# Altium PCB PCB1.PcbDoc
Units mm, origin at the board's own origin, x right, y up, seen from the top; angles counter-clockwise.
Board outline 104.14 x 50.8 mm, 2 copper layers (Top Layer, Bottom Layer); 42 components, 27 nets, 105 pads, 0 vias.
Unrouted connection lines stored in the file: 39.
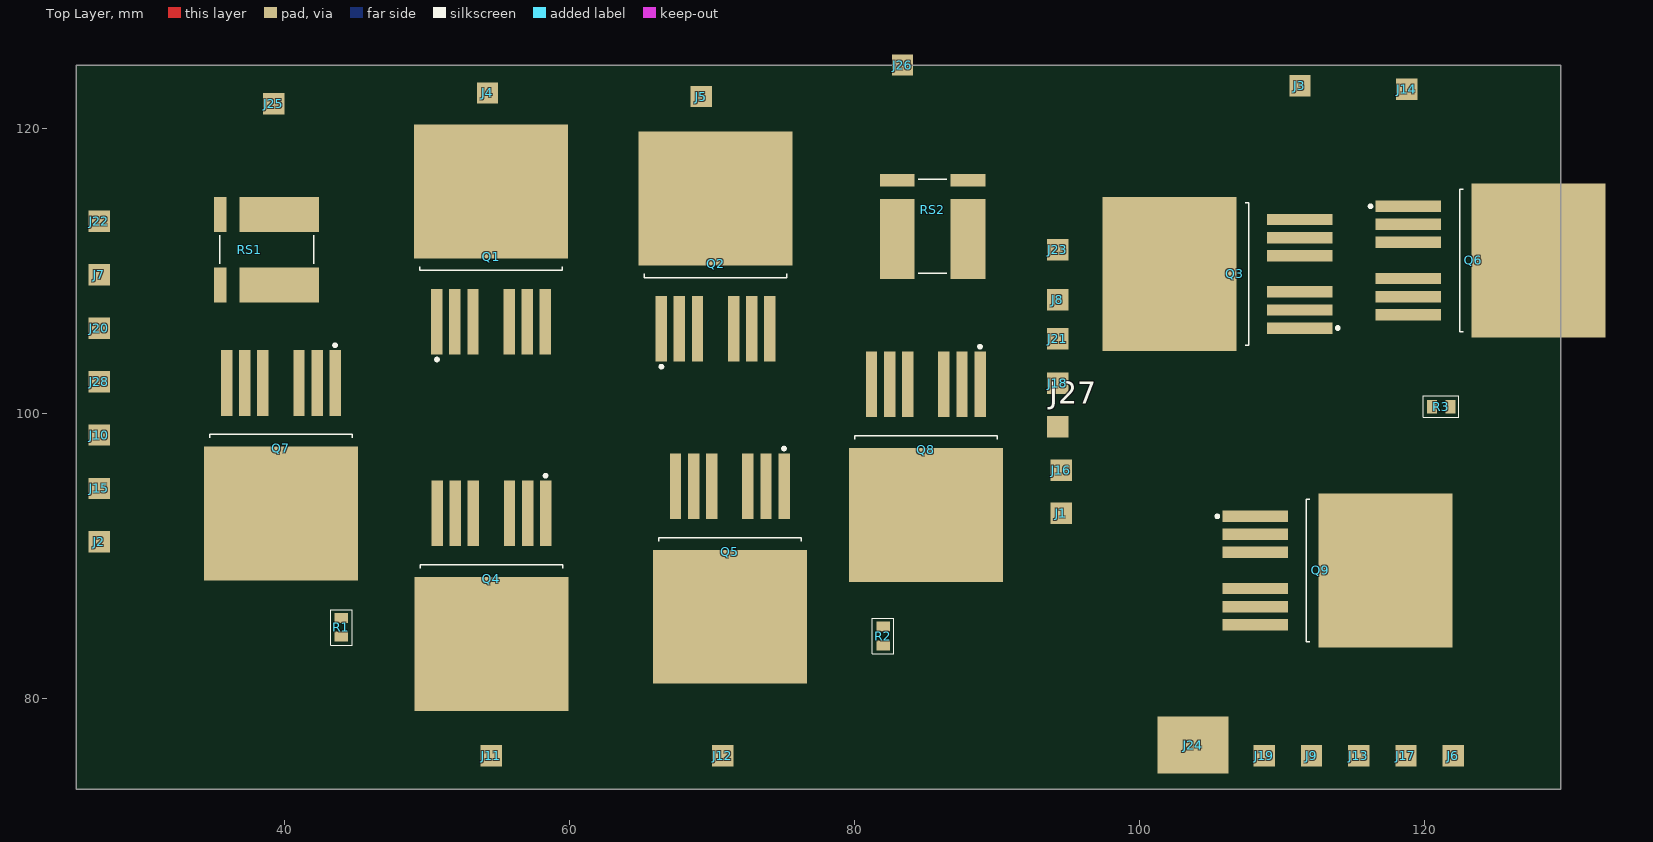
[diagram p0: Top Layer view]
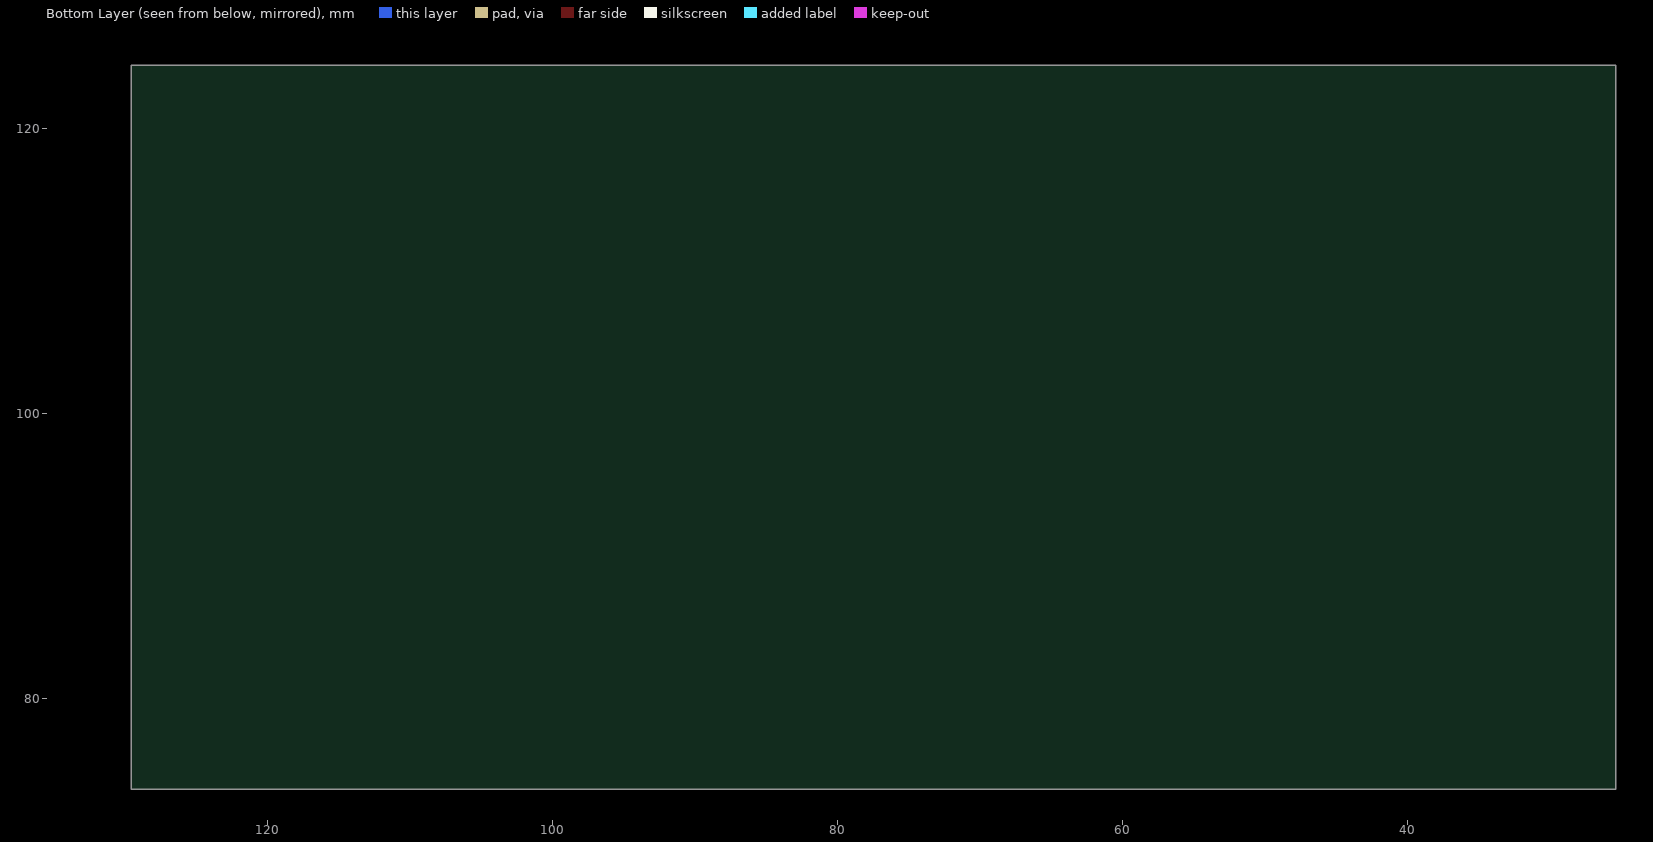
[diagram p1: Bottom Layer view, seen from below]

## Layer stack, top to bottom
Top Solder: solder mask 0.0102, Solder Resist, Dk 3.5
Top Layer: signal copper 0.0356
Dielectric 1: dielectric 0.32, FR-4, Dk 4.8
Bottom Layer: signal copper 0.0356
Bottom Solder: solder mask 0.0102, Solder Resist, Dk 3.5

## Board outline
25.4,73.66 25.4,124.46 129.54,124.46 129.54,73.66

## Design rules (kind name [scope] priority, off if disabled: settings)
Clearance [All] p1: gap=0.254 ignorepadtopadclearanceinfootprint=FALSE except(0: Arc-Hole Track-Hole SMDPad-Hole THPad-Hole Via-Hole Fill-Hole Poly-Hole Region-Hole Text-Hole)
PolygonConnect [All] p1: connectstyle=Relief reliefconductorwidth=0.254 reliefentries=4 polygonreliefangle="90 Angle" airgapwidth=0.254
RoutingVias [All] p1: holewidth=0.711 width=1.27 viastyle="Through Hole" minholewidth=0.711 minwidth=1.27 maxholewidth=0.711 maxwidth=1.27
SolderMaskExpansion [All] p1: expansion=0.102 istentingtop=FALSE
Width [All] p1: maxlimit=0.254 minlimit=0.254 preferedwidth=0.254
30 further rules are at their usual default settings.

## Components (designator, comment, footprint, x,y, rotation, side; value= is the part's Value field where it differs from the comment)
J1 "CON_SMD_SMALL" CONN_SMALL 94.5,93 r0 top
J2 "CON_SMD_SMALL" CONN_SMALL 27,91 r0 top
J3 "CON_SMD_SMALL" CONN_SMALL 111.25,123 r0 top
J4 "CON_SMD_SMALL" CONN_SMALL 54.25,122.5 r0 top
J5 "CON_SMD_SMALL" CONN_SMALL 69.25,122.25 r0 top
J6 "CON_SMD_SMALL" CONN_SMALL 122,76 r0 top
J7 "CON_SMD_SMALL" CONN_SMALL 27,109.75 r0 top
J8 "CON_SMD_SMALL" CONN_SMALL 94.25,108 r0 top
J9 "CON_SMD_SMALL" CONN_SMALL 112.063,76 r0 top
J10 "CON_SMD_SMALL" CONN_SMALL 27,98.5 r90 top
J11 "CON_SMD_SMALL" CONN_SMALL 54.5,76 r0 top
J12 "CON_SMD_SMALL" CONN_SMALL 70.75,76 r90 top
J13 "CON_SMD_SMALL" CONN_SMALL 115.375,76 r90 top
J14 "CON_SMD_SMALL" CONN_SMALL 118.75,122.75 r90 top
J15 "CON_SMD_SMALL" CONN_SMALL 27,94.75 r90 top
J16 "CON_SMD_SMALL" CONN_SMALL 94.5,96.042 r90 top
J17 "CON_SMD_SMALL" CONN_SMALL 118.688,76 r90 top
J18 "CON_SMD_SMALL" CONN_SMALL 94.25,102.125 r90 top
J19 "CON_SMD_SMALL" CONN_SMALL 108.75,76 r90 top
J20 "CON_SMD_SMALL" CONN_SMALL 27,106 r90 top
J21 "CON_SMD_SMALL" CONN_SMALL 94.25,105.25 r0 top
J22 "CON_SMD_SMALL" CONN_SMALL 27,113.5 r90 top
J23 "CON_SMD_SMALL" CONN_SMALL 94.25,111.5 r90 top
J24 "CON_SMD_SMALL" CON_BIG 103.75,76.75 r90 top
J25 "CON_SMD_SMALL" CONN_SMALL 39.25,121.75 r90 top
J26 "CON_SMD_SMALL" CONN_SMALL 83.366,124.46 r0 top
J27 "CON_SMD_SMALL" CONN_SMALL 94.25,99.083 r90 top
J28 "CON_SMD_SMALL" CONN_SMALL 27,102.25 r90 top
Q1 "IPB180N04S4-01" IPB240N04S4R9ATMA1 54.5,111.5 r0 top
Q2 "IPB180N04S4-01" IPB240N04S4R9ATMA1 70.25,111 r0 top
Q3 "IPB180N04S4-01" IPB240N04S4R9ATMA1 106.2,109.81 r90 top
Q4 "IPB180N04S4-01" IPB240N04S4R9ATMA1 54.52,87.95 r180 top
Q5 "IPB180N04S4-01" IPB240N04S4R9ATMA1 71.25,89.85 r180 top
Q6 "IPB180N04S4-01" IPB240N04S4R9ATMA1 123.9,110.75 r270 top
Q7 "IPB180N04S4-01" IPB240N04S4R9ATMA1 39.75,97.1 r180 top
Q8 "IPB180N04S4-01" IPB240N04S4R9ATMA1 85,97 r180 top
Q9 "IPB180N04S4-01" IPB240N04S4R9ATMA1 113.15,89 r270 top
R1 "R" RESC1608X06N 44,85 r90 top value=100R
R2 "R" RESC1608X06N 82,84.4 r90 top value=100R
R3 "R" RESC1608X06N 121.15,100.5 r0 top value=100R
RS1 "WSLP2726L5000FEA" WSL27261L000FEA 38.75,111.5 r90 top
RS2 "WSLP2726L5000FEA" WSL27261L000FEA 85.48,113.14 r0 top

## Footprints (in the part's own frame and the unit in brackets; to place one, negate y for a bottom-side part, rotate by r counter-clockwise, add the part's x,y. Pads: shape width x height; smd on the part's side, far side on the other; paste and mask are expansions set on the pad)
CON_BIG [mm]
  rect 4x5 smd: 1(0,0)
CONN_SMALL [mm]
  rect 1.5x1.5 smd: 1(0,0)
IPB240N04S4R9ATMA1 [mm]
  rect 0.8x4.6 smd: 1(-3.81,-5.05) 2(-2.54,-5.05) 3(-1.27,-5.05) 4(1.27,-5.05) 5(2.54,-5.05) 6(3.81,-5.05)
  rect 10.8x9.4 smd: 7(0,4.1)
  silkscreen extent -5,-7.8 5,-1.2, body extent -5.08,-6.96 5.08,8.29, height 5.08
RESC1608X06N [mm] "Chip Resistor, 2-Leads, Body 1.55x0.85mm, IPC Medium Density"
  rect 0.7x0.95 smd: 1(-0.65,0) 2(0.65,0)
  silkscreen extent -1.25,-0.75 1.25,0.75, body extent -0.8,-0.48 0.8,0.48, height 0.55
WSL27261L000FEA [mm]
  rect 2.44x5.6 smd: 1(-2.48,-0.89) 2(2.48,-0.89)
  rect 2.44x0.89 smd: 3(-2.48,3.245) 4(2.48,3.245)
  silkscreen extent -1,-3.3 1,3.3, body extent -3.45,-3.3 3.45,3.3, height 2.95

## Part data
Q1 Q2 Q3 Q4 Q5 Q6 Q7 Q8 Q9: "MOSFET (N-Channel)", Manufacturer_Name=Infineon, Mouser Part Number=726-IPB180N04S4-01, Datasheet Link=https://www.infineon.com/dgdl/Infineon-IPB180N04S4_01-DS-v01_00-en.pdf?fileId=db3a304328c6bd5c01291c432c5d5d67, Height=4.5mm, Manufacturer_Part_Number=IPB180N04S4-01, Mouser Price/Stock=https://www.mouser.co.uk/ProductDetail/Infineon-Technologies/IPB180N04S4-01?qs=HwMeRNENlMacaRTn%252BkmAXA%3D%3D
RS1 RS2: "Resistor", Manufacturer_Name=Vishay, Mouser Part Number=71-WSLP2726L5000FEA, Arrow Part Number=WSLP2726L5000FEA, Arrow Price/Stock=https://www.arrow.com/en/products/wslp2726l5000fea/vishay?region=nac, Datasheet Link=https://www.vishay.com/docs/30179/wslp2726.pdf, Height=2mm, Manufacturer_Part_Number=WSLP2726L5000FEA, Mouser Price/Stock=https://www.mouser.co.uk/ProductDetail/Vishay-Dale/WSLP2726L5000FEA?qs=H%252BW4FWGGyHeDwweg1TYd4Q%3D%3D

## Nets (pads, with @x,y where several pads share a name; then routed paths per layer and width w, separated by ;. In a path a pad name is that pad's centre, name@x,y a point inside that pad or via, vN(x,y) a via of type N, cw(c..) or ccw(c..) an arc to the next point about the centre after c; other vN are vias at no path point)
A_COM: J10.1 Q1.5 Q4.5 Q7.4 R1.1
A_H: J7.1 Q1.1
A_L: J15.1 Q7.1
A_S_L: J28.1 RS1.1
B_COM: J27.1 Q2.5 Q5.5 Q8.4 R2.1
B_H: J8.1 Q2.1
B_L: J16.1 Q8.1
B_S_L: J18.1 Q8.5 RS2.2
C_COM: J13.1 Q9.4 R3.1
C_H: J9.1 Q3.1
C_S_L: J19.1 J24.1 Q9.5
CL: J17.1 Q9.1
GND_1: J25.1 RS1.2
GND_2: J26.1 RS2.1
NetJ11_1: J11.1 Q4.4
NetJ12_1: J12.1 Q5.4
NetJ14_1: J14.1 Q6.4
PD_A: J2.1 Q4.1 R1.2
PD_B: J1.1 Q5.1 R2.2
PD_C: J6.1 Q6.1 R3.2
S1_N: J20.1 RS1.3
S1_P: J22.1 RS1.4
S2_N: J21.1 RS2.4
S2_P: J23.1 RS2.3
VCC_1: J4.1 Q1.4
VCC_2: J5.1 Q2.4
VCC_3: J3.1 Q3.4
pads on no net: Q1.2 Q1.3 Q1.6 Q1.7 Q2.2 Q2.3 Q2.6 Q2.7 Q3.2 Q3.3 Q3.5 Q3.6 Q3.7 Q4.2 Q4.3 Q4.6 Q4.7 Q5.2 Q5.3 Q5.6 Q5.7 Q6.2 Q6.3 Q6.5 Q6.6 Q6.7 Q7.2 Q7.3 Q7.5 Q7.6 Q7.7 Q8.2 Q8.3 Q8.6 Q8.7 Q9.2 Q9.3 Q9.6 Q9.7

## Silkscreen, mask and mechanical layers (free items; w line width, h text height)
Mechanical 1:
  circle w0.006: c172.599,62.24 r0.003
  circle w0.006: c172.599,43.98 r0.003
  circle w0.006: c75.25,43.98 r0.003
  circle w0.006: c75.25,62.24 r0.003
  lines w0.013: 75.25,43.98 78.191,43.98 78.191,62.24 75.25,62.24 ; 75.75,37.75 75.75,42.75 86.78,42.75 86.78,37.75 ; 80.543,66.55 80.543,61.55 86.837,61.55 86.837,66.55 ; 87.335,66.55 87.335,61.55 94.755,61.55 94.755,66.55 ; 121.882,-31.887 126.882,-31.887 126.882,-26.127 121.882,-26.127 ; 123.924,32.765 123.924,66.55 ; 153.094,66.55 153.094,61.55 160.514,61.55 160.514,66.55 ; 161.012,66.55 161.012,61.55 167.306,61.55 167.306,66.55 ; 161.069,37.75 161.069,42.75 172.099,42.75 172.099,37.75 ; 172.599,43.98 169.657,43.98 169.657,62.24 172.599,62.24 ; 75.25,37.75 75.25,66.55 95.25,66.55 95.25,37.75 75.25,37.75 ; 121.882,-37.627 121.882,-17.627 150.682,-17.627 150.682,-37.627 121.882,-37.627 ; 121.882,-25.627 121.882,-18.537 126.882,-18.537 126.882,-25.627 121.882,-25.627 ; 125.832,-37.627 125.832,-35.627 147.142,-35.627 147.142,-37.627 125.832,-37.627 ; 145.682,-34.707 145.682,-27.078 150.682,-27.078 150.682,-34.707 145.682,-34.707 ; 152.599,37.75 172.599,37.75 172.599,66.55 152.599,66.55 152.599,37.75
  lines w0.254: 24.9,73.66 129.04,73.66 129.04,124.46 24.9,124.46 24.9,73.66 ; 30.46,78.74 60.46,78.74 60.46,118.74 30.46,118.74 30.46,78.74 ; 63,78.74 93,78.74 93,118.74 63,118.74 63,78.74 ; 96.02,78.74 126.02,78.74 126.02,118.74 96.02,118.74 96.02,78.74